# Altium PCB Boost Convertor V1 PCB.PcbDoc
Units mm, origin at the board's own origin, x right, y up, seen from the top; angles counter-clockwise.
Board outline 33.1 x 32.2 mm, 2 copper layers (Top Layer, Bottom Layer); 10 components, 7 nets, 27 pads, 1 vias.
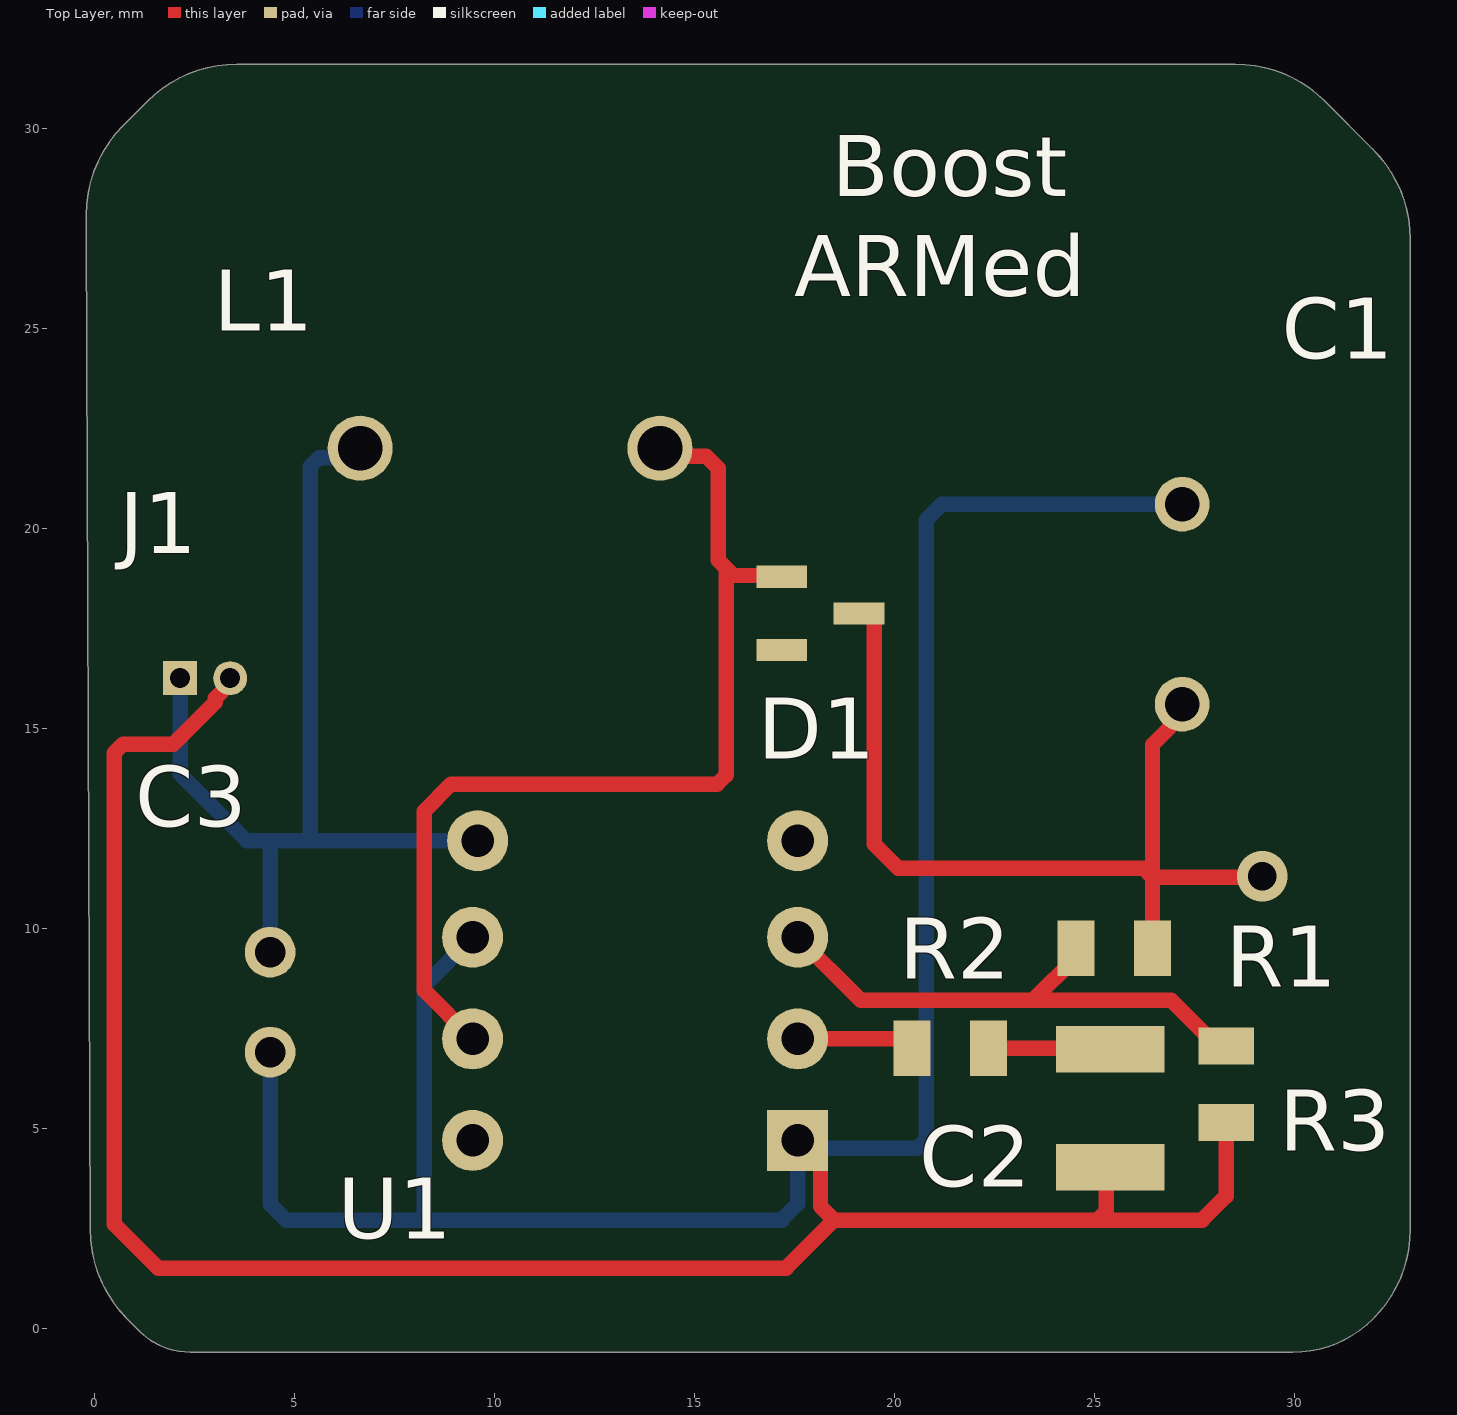
[diagram p0: Top Layer view]
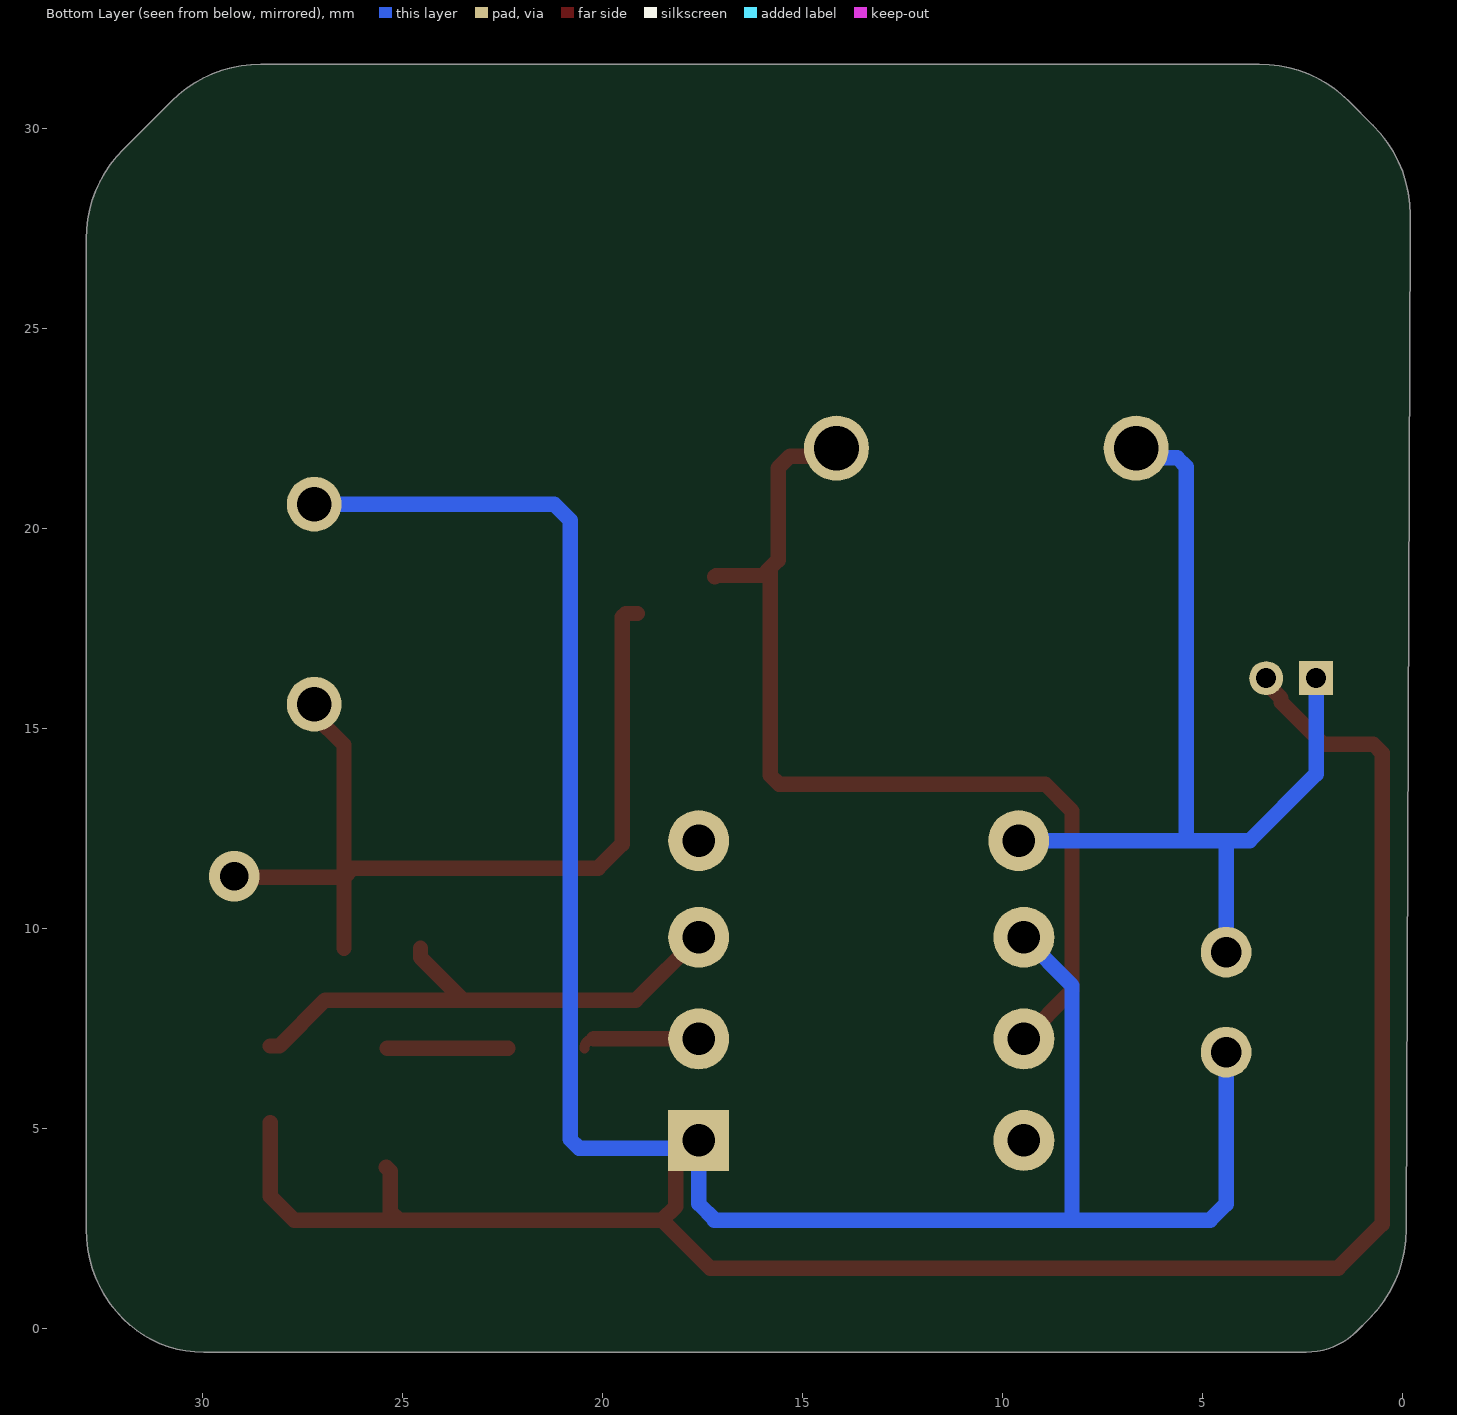
[diagram p1: Bottom Layer view, seen from below]
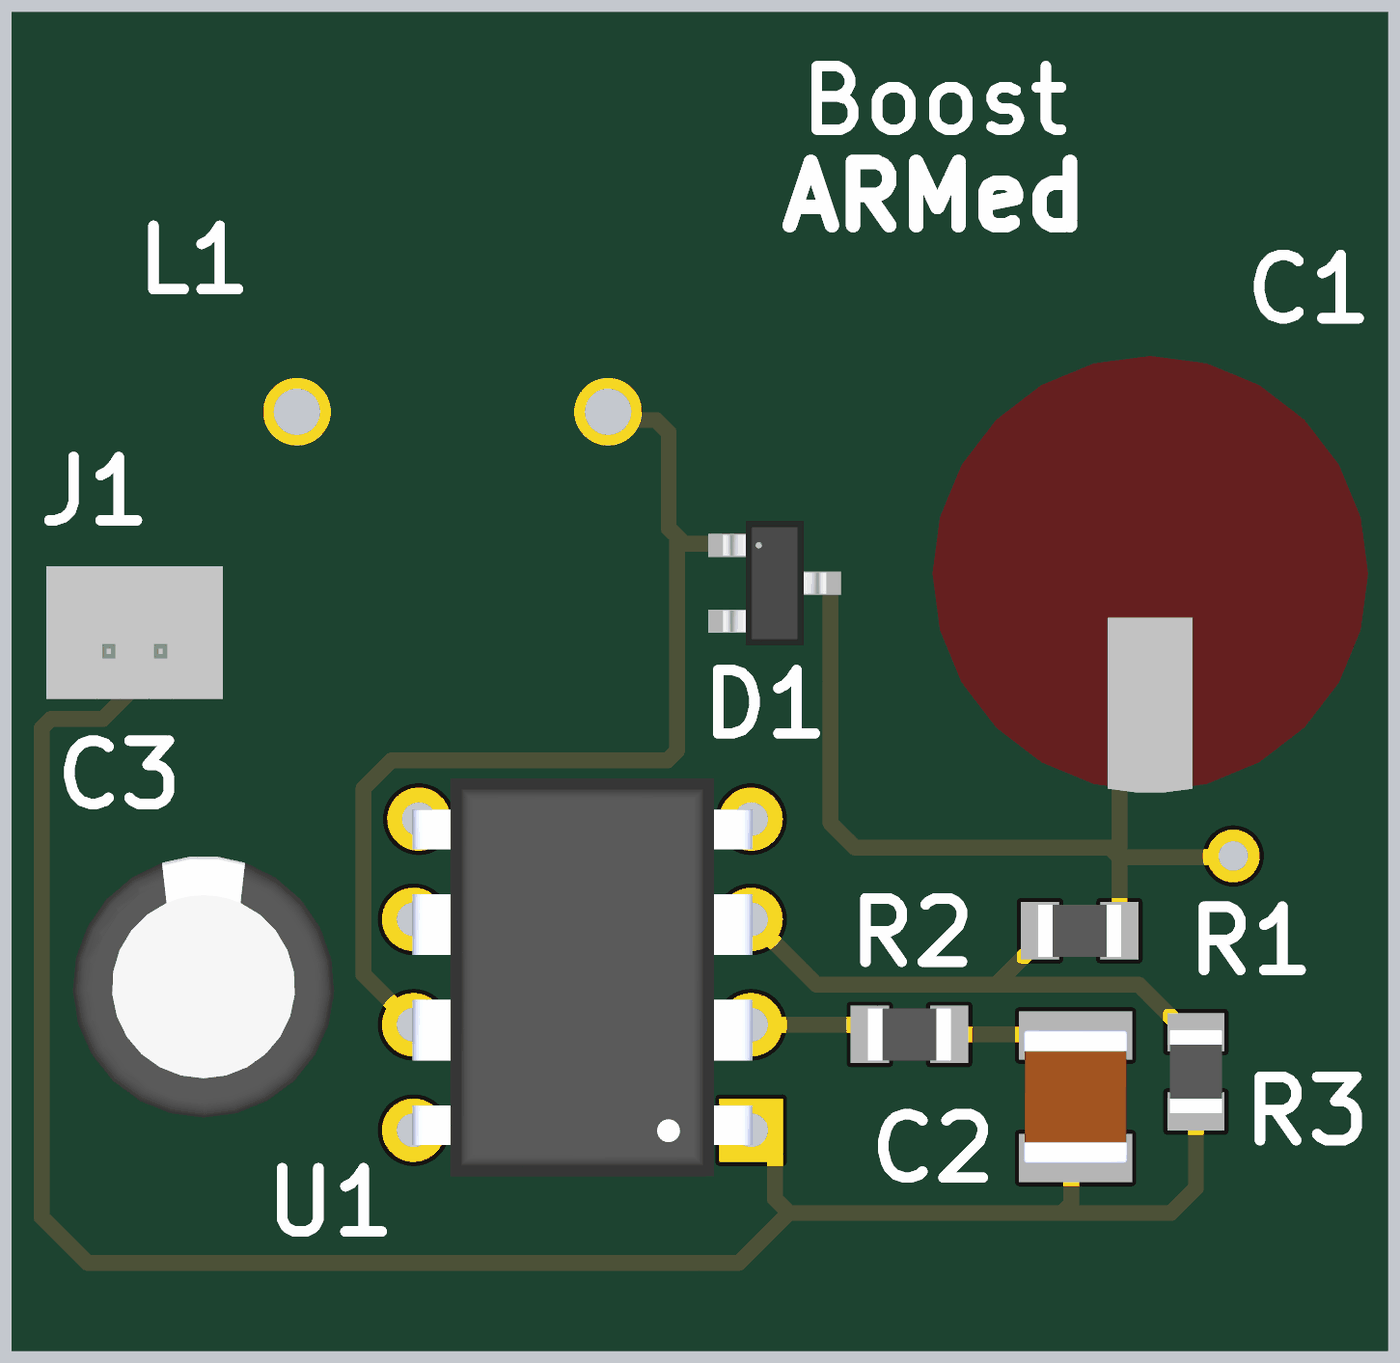
[diagram p2: 3D render of the assembled board from above, using the file's embedded part models]

## Layer stack, top to bottom
Top Solder: solder mask 0.0102, Solder Resist, Dk 3.5
Top Layer: signal copper 0.0356
Dielectric 1: dielectric 0.32, FR-4, Dk 4.8
Bottom Layer: signal copper 0.0356
Bottom Solder: solder mask 0.0102, Solder Resist, Dk 3.5

## Board outline
-0.1,2.47 ccw(c3.066,2.47) 0.827,0.231 1.134,-0.076 ccw(c2.4,1.19) 2.4,-0.6 29.966,-0.6 ccw(c29.966,2.238) 31.973,0.231 ccw(c29.734,2.47) 32.9,2.47 32.9,27.23 ccw(c29.734,27.23) 31.973,29.469 30.769,30.673 ccw(c28.53,28.434) 28.53,31.6 3.57,31.6 ccw(c3.57,28.434) 1.331,30.673 0.727,30.069 ccw(c2.966,27.83) -0.2,27.83 -0.2,27.5 -0.2,27.488

## Design rules (kind name [scope] priority, off if disabled: settings)
Clearance [All] p1: gap=0.254 ignorepadtopadclearanceinfootprint=FALSE
PolygonConnect [All] p1: connectstyle=Relief reliefconductorwidth=0.254 reliefentries=4 polygonreliefangle="90 Angle" airgapwidth=0.254
RoutingVias [All] p1: holewidth=0.711 width=1.27 viastyle="Through Hole" minholewidth=0.711 minwidth=1.27 maxholewidth=0.711 maxwidth=1.27
SolderMaskExpansion [All] p1: expansion=0.102 istentingtop=FALSE
SupplyNets "Schematic Supply Nets_2" [InNet('+5V')] p1: voltage=0.000
SupplyNets "Schematic Supply Nets_1" [InNet('GND')] p2: voltage=0.000
SupplyNets "Schematic Supply Nets" [InNet('+12V')] p3: voltage=0.000
Width [All] p1: maxlimit=0.381 minlimit=0.254 preferedwidth=0.254 minimp=50.000000 maximp=50.000000 favimp=50.000000
30 further rules are at their usual default settings.

## Components (designator, comment, footprint, x,y, rotation, side; value= is the part's Value field where it differs from the comment)
C1 "16ZLH1000MEFC10X16" 25PX1000MEFCT810X16 27.2,18.06 r270 top value=1000uF
C2 "CL10B105KA8NNNC" C1210C105K5RACTU 25.4,5.5 r270 top value=1uF
C3 "35ZLH100MEFC6.3X11" 35ZLH100MEFC6.3X11 4.4,8.17 r90 top value=100uF
D1 "BAT1000-7-F" BAT1000-7-F 17.9,18.25 r270 top
J1 "Comment" "Molex Connector" 2.775,16.25 r0 top
L1 "CTX50-1-52-R" CTX50-1-52-R 10.587,22.127 r0 top value=50uH
R1 "RC0805FR-0710K7L" RC0805FR-0710K7L 25.5,9.5 r0 top value=10.7K
R2 "#NAME?" RC0805FR-071KL 21.4,7 r0 top value=1kR
R3 "RC0805FR-071K24L" RC0805FR-071K24L 28.3,6.1 r270 top value=1.24K
U1 "LT1172CN8#PBF" LT1172CN8#PBF-ND 13.65,8.25 r180 top

## Footprints (in the part's own frame and the unit in brackets; to place one, negate y for a bottom-side part, rotate by r counter-clockwise, add the part's x,y. Pads: shape width x height; smd on the part's side, far side on the other; paste and mask are expansions set on the pad)
25PX1000MEFCT810X16 [mil] "Electrolytic Capacitor 1000uF"
  round 54 / inner round 60 / far side round 54 hole 34 paste-99999 mask+0: 1(-100,0) 2(96.85,0)
  body extent -208,-206 206,206, height 690
35ZLH100MEFC6.3X11 [mil] "Electrolytic Capacitor 100uF"
  round 50 / inner round 60 / far side round 50 hole 30 paste-99999 mask+0: 1(-50,0) 2(48.43,0)
  body extent -125,-124 123,124, height 492
BAT1000-7-F [mil] "Diode"
  rect 22x50 smd paste+0 mask+0: 1(-21.02,-28) 2(51.02,-28) 3(15,48)
  body extent -44,-39 74,59, height 43
C1210C105K5RACTU [mm] "Ceramic Capacitor 1uF"
  rect 1.16x2.72 smd: 1(-1.475,0) 2(1.475,0)
  body extent -1.6,-1.25 1.6,1.25, height 1.45
CTX50-1-52-R [mil] "Inductor 50uH"
  round 64 / inner round 60 / far side round 64 hole 44 paste-99999 mask+0: 1(-155,-5) 2(140,-5)
LT1172CN8#PBF-ND [mil] "ICU"
  rect 60x60 / inner round 60 / far side rect 60x60 hole 32: 1(-155,140)
  round 60 hole 32: 2(-155,40) 3(-155,-60) 4(-155,-155) 5(160,-155) 6(165,-60) 7(165,40) 8(165,140)
  body extent -156,-194 166,184, height 200
"Molex Connector" [mm]
  rect 0.85x0.85 / inner round 0.85 / far side rect 0.85x0.85 hole 0.5: 01(-0.625,0)
  round 0.85 hole 0.5: 02(0.625,0)
  body extent -2.16,-1.17 2.09,2.03, height 5.53
RC0805FR-071K24L [mm] "1.24Kohm Resistor"
  rect 0.92x1.38 smd: 1(-0.955,0) 2(0.955,0)
  body extent -1,-0.63 1,0.63, height 0.6
RC0805FR-071KL [mm] "1Kohm resistor"
  rect 0.92x1.38 smd: 1(-0.955,0) 2(0.955,0)
  body extent -1,-0.63 1,0.63, height 0.6
RC0805FR-0710K7L [mm] "Resistor 10.7 Kohm - 0805"
  rect 0.92x1.38 smd: 1(-0.955,0) 2(0.955,0)
  body extent -1,-0.63 1,0.63, height 0.6

## Part data
C1: "Aluminum Electrolytic Capacitor, Polarized, Aluminum (wet), 16V, 20% +Tol, 20% -Tol, 1000uF, Through Hole Mount", Capacitor Type=Aluminium, Leakage Current=160uA, Manufacturer=Rubycon, Manufacturer Series=ZLH, Max Operating Temperature=105°C, Min Operating Temperature=-40°C, Package Shape=Cylindrical, Package Style=RadialMeter, Rated DC Voltage (URdc)=16V, Ripple Current=1.056A, Supplier Part Number=1189-1147-ND, Tolerance  (fill in as +-)=20%, Category="Aluminum Electrolytic Capacitors", ComponentLink1Description=https://datasheet.ciiva.com:443/pdfs/VipMasterIC/IC/RUBY/RUBYS01453/RUBYS01453-1.pdf?src-supplier=IHS+Markit, ComponentLink1URL=https://datasheet.ciiva.com:443/pdfs/VipMasterIC/IC/RUBY/RUBYS01453/RUBYS01453-1.pdf?src-supplier=IHS+Markit, ComponentLink2Description=https://datasheet.ciiva.com/6300/e-zlh-6300460.pdf?src-supplier=Digikey, ComponentLink2URL=https://datasheet.ciiva.com/6300/e-zlh-6300460.pdf?src-supplier=Digikey, ComponentLink3Description=https://datasheet.ciiva.com/11692/e-zlh-11692166.pdf?src-supplier=Avnet, ComponentLink3URL=https://datasheet.ciiva.com/11692/e-zlh-11692166.pdf?src-supplier=Avnet, ComponentLink4Description=https://datasheet.ciiva.com/16313/e-zlh-16313390.pdf?src-supplier=Future+Electronics, ComponentLink4URL=https://datasheet.ciiva.com/16313/e-zlh-16313390.pdf?src-supplier=Future+Electronics, ComponentLink5Description=https://datasheet.ciiva.com/22732/1910927-22732477.pdf?src-supplier=Element14, ComponentLink5URL=https://datasheet.ciiva.com/22732/1910927-22732477.pdf?src-supplier=Element14, Diameter=10mm, Dielectric Material=Aluminium, Length=16mm, Manufacturer Part Number=16ZLH1000MEFC10X16, Mounting Technology="Through Hole", Packaging=Bulk, Pins=2, Polarity=Polarized, Pricing="1=0.61, 10=0.377, 50=0.2812, 100=0.2505, 500=0.19778, 1000=0.18113, 3000=0.16029, 5000=0.1525 (USD)", Reach SVHC Compliant=Yes, RoHS=Yes, RoHS Compliant=Yes, Stock=32532, Supplier=Digikey, Tan Delta=0.16, Terminal Pitch=5mm, Termination=Wire, Tolerance (fill in as +-)=20%
C2: "Ceramic Capacitor 1uF", Capacitor Type=Aluminium, Manufacturer=KEMET, Manufacturer Part Number=ESL105M100AC3AA, Supplier Part Number=399-15737-ND, ComponentLink1Description=https://datasheet.ciiva.com:443/pdfs/VipMasterIC/IC/KEME/KEME-S-A0008958449/KEME-S-A0008958449-1.pdf?src-supplier=IHS+Markit, ComponentLink1URL=https://datasheet.ciiva.com:443/pdfs/VipMasterIC/IC/KEME/KEME-S-A0008958449/KEME-S-A0008958449-1.pdf?src-supplier=IHS+Markit, ComponentLink2Description=https://api.kemet.com/component-edge/download/datasheet/ESL105M100AC3AA.pdf?src-supplier=Digikey, ComponentLink2URL=https://api.kemet.com/component-edge/download/datasheet/ESL105M100AC3AA.pdf?src-supplier=Digikey, ComponentLink3Description=https://datasheet.octopart.com/ESL105M100AC3AA-KEMET-datasheet-176335207.pdf?src-supplier=Newark, ComponentLink3URL=https://datasheet.octopart.com/ESL105M100AC3AA-KEMET-datasheet-176335207.pdf?src-supplier=Newark, Pins=2, Pricing="1=0.15, 10=0.095, 50=0.0708, 100=0.0633, 500=0.04972, 1000=0.04522, 2500=0.04024, 5000=0.03706 (USD)", Reach SVHC Compliant=Yes, RoHS=Yes, RoHS Compliant=Yes, Stock=14632, Supplier=Digikey, Supplier 1=Avnet, Supplier Part Number 1=CL10B105KA8NNNC
C3: library part a00bbbee19879c290e62620ae7e47b1, "CAP ALUM 100UF 20% 35V RADIAL", Capacitance=100uF, Case/Package=Radial, Dielectric Material=Aluminium, Leakage Current=3uA, Max Operating Temperature=105°C, Min Operating Temperature=-40°C, Package Quantity=2000, Ripple Current=540mA, Tolerance=20%, Voltage=35V, Construction=RADIAL, Diameter=6.3mm, Height=11mm, Height - Seated (Max)=0.492inch, Impedance=94mR, Lead Diameter=0.5mm, Lead Pitch=2.5mm, Life (Hours)=6000Hour, Mount="Through Hole", Number of Pins=2, Packaging=Bulk, Radiation Hardening=No, REACH SVHC="No SVHC", Ripple Current (AC)=540mA, RoHS Compliant=Yes, Series=ZLH, Termination=Radial, Voltage Rating=35V, Voltage Rating (DC)=35V
D1: "Diode 40 V 1A Surface Mount SOT-23-3", Forward Voltage=270mV, Manufacturer=Diodes, Max Operating Temperature=125°C, Max Output current=1A, Max Power Dissipation=500mW, Min Operating Temperature=-40°C, Non-rep Pk Forward Current-Max=5.5A, Package Body Material=Plastic, Package Shape=Rectangular, Package Style="SMALL OUTLINEMeter", Peak Reflow Temperature (Cel)=260°C, Rep Pk Reverse Voltage-Max=40V, Supplier Part Number=BAT1000-7FDICT-ND, Time @ Peak Reflow Temperature-Max (s)=40s, Additional Feature="HIGH RELIABILITY", Category="Rectifier Diodes", ComponentLink1Description=https://datasheet.ciiva.com:443/pdfs/VipMasterIC/IC/DIOD/DIODS20202/DIODS20202-1.pdf?src-supplier=IHS+Markit, ComponentLink1URL=https://datasheet.ciiva.com:443/pdfs/VipMasterIC/IC/DIOD/DIODS20202/DIODS20202-1.pdf?src-supplier=IHS+Markit, ComponentLink2Description=https://datasheet.ciiva.com/4715/ds30245-88157-4715721.pdf?src-supplier=Mouser, ComponentLink2URL=https://datasheet.ciiva.com/4715/ds30245-88157-4715721.pdf?src-supplier=Mouser, ComponentLink3Description=https://datasheet.ciiva.com/26949/getdatasheetpartid-128111-26949412.pdf?src-supplier=Verical, ComponentLink3URL=https://datasheet.ciiva.com/26949/getdatasheetpartid-128111-26949412.pdf?src-supplier=Verical, ComponentLink4Description=https://datasheet.ciiva.com/48678/ds30245-48678245.pdf?src-supplier=Avnet, ComponentLink4URL=https://datasheet.ciiva.com/48678/ds30245-48678245.pdf?src-supplier=Avnet, ComponentLink5Description=https://datasheet.ciiva.com/8301/ds30245-8301339.pdf?src-supplier=Avnet, ComponentLink5URL=https://datasheet.ciiva.com/8301/ds30245-8301339.pdf?src-supplier=Avnet, ComponentLink6Description=https://datasheet.ciiva.com/16418/ds30245-16418363.pdf?src-supplier=Future+Electronics, ComponentLink6URL=https://datasheet.ciiva.com/16418/ds30245-16418363.pdf?src-supplier=Future+Electronics, Diode Element Material=SILICON, Diode Type=RECTIFIER, JESD-30 Code=R-PDSO-G3, JESD-609 Code=e3, Manufacturer Part Number=BAT1000-7-F, Moisture Sensitivity Level=1, Number of Elements=1, Pins=3, Pricing="1=0.63, 10=0.416, 100=0.3252, 500=0.25124, 1000=0.2177 (USD)", Qualification Status="Not Qualified", Reach SVHC Compliant=Yes, RoHS=Yes, RoHS Compliant=Yes, Stock=10173, Supplier=Digikey, Surface Mount=Yes, Technology=SCHOTTKY, Terminal Finish=Tin, Terminal Form="Gull Wing", Terminal Position=DUAL
L1: "General Purpose Inductor, 50uH, 1 Element, Iron-Core", DC Resistance (DCR)=71.5mR, Inductance-Nom (L)=50uH, Inductor Application="POWER INDUCTOR", Inductor Type="GENERAL PURPOSE INDUCTOR", Manufacturer="Eaton Cooper", Max Current Rating=2.6A, Max Operating Temperature=75°C, Min Operating Temperature=-40°C, Package Diameter=16.2mm, Package Length=9mm, Package Style=ToroidalMeter, Supplier Part Number=513-1108-ND, Category="Fixed Inductors", Channels=1, ComponentLink1Description=https://datasheet.ciiva.com:443/pdfs/VipMasterIC/IC/ETON/ETON-S-A0008259577/ETON-S-A0008259577-1.pdf?src-supplier=IHS+Markit, ComponentLink1URL=https://datasheet.ciiva.com:443/pdfs/VipMasterIC/IC/ETON/ETON-S-A0008259577/ETON-S-A0008259577-1.pdf?src-supplier=IHS+Markit, ComponentLink2Description=https://datasheet.ciiva.com/8005/705007-8005134.pdf?src-supplier=Element14, ComponentLink2URL=https://datasheet.ciiva.com/8005/705007-8005134.pdf?src-supplier=Element14, ComponentLink3Description=https://datasheet.ciiva.com/16430/bus-elx-ds-pm4304-lpci-series-16430805.pdf?src-supplier=Future+Electronics, ComponentLink3URL=https://datasheet.ciiva.com/16430/bus-elx-ds-pm4304-lpci-series-16430805.pdf?src-supplier=Future+Electronics, ComponentLink4Description=https://datasheet.ciiva.com/30168/4935b080188143dbb73de2176f2c5e73-30168168.pdf?src-supplier=Onlinecomponents.com, ComponentLink4URL=https://datasheet.ciiva.com/30168/4935b080188143dbb73de2176f2c5e73-30168168.pdf?src-supplier=Onlinecomponents.com, Construction="Vertical Mount", Core Material=Ferrite, Lead Diameter=0.58mm, Lead Length=10mm, Lead Pitch=7.5mm, Manufacturer Part Number=CTX50-1-52-R, Packaging=Bulk, Pins=2, Pricing="1=2.67, 10=2.196, 25=2.0312, 50=1.915, 100=1.8057, 300=1.6451, 600=1.55137, 1200=1.46311, 2700=1.36639 (USD)", Reach SVHC Compliant=Yes, RoHS=Yes, RoHS Compliant=Yes, Shape/Size Description="CYLINDRICAL PACKAGE", Shielding=Unshielded, Stock=1049, Supplier=Digikey, Surface Mount=No, Terminal Placement=Radial, Termination=Wire
R1: "Fixed Resistor, Metal Film, 0.25W, 10700ohm, 250V, 1% +/-Tol, -100,100ppm/Cel", Manufacturer=Yageo, Manufacturer Part Number=MFR-25FBF52-10K7, Supplier Part Number=10.7KXBK-ND, Supplier Part Number 1=311-10.7KCRCT-ND, Category="Through-Hole Resistors", ComponentLink1Description=https://datasheet.ciiva.com:443/pdfs/VipMasterIC/IC/YAGO/YAGO-S-A0009358480/YAGO-S-A0009358480-1.pdf?src-supplier=IHS+Markit, ComponentLink1URL=https://datasheet.ciiva.com:443/pdfs/VipMasterIC/IC/YAGO/YAGO-S-A0009358480/YAGO-S-A0009358480-1.pdf?src-supplier=IHS+Markit, ComponentLink2Description=https://datasheet.ciiva.com/25645/yageolr-mfr-2013-25645816.pdf?src-supplier=Digikey, ComponentLink2URL=https://datasheet.ciiva.com/25645/yageolr-mfr-2013-25645816.pdf?src-supplier=Digikey, Pricing="1=0.1, 10=0.039, 25=0.0328, 50=0.0286, 100=0.0251, 250=0.02128, 500=0.0189, 1000=0.01685, 5000=0.01321 (USD)", RoHS=Yes, Stock=6622, Supplier=Digikey, Supplier 1=Digikey
R2: library part RC0805FR-071KL, "Fixed Resistor, Carbon Film, 0.25W, 1000ohm, 350V, 5% +/-Tol, -400,0ppm/Cel, Through Hole Mount", Manufacturer="Stackpole Electronics", Manufacturer Part Number=CF14JT1K00, Max Operating Temperature=155°C, Min Operating Temperature=-55°C, Package Length=6mm, Package Shape=Tubular, Package Style=AXIAL, Power=250mW, Rated Temperature=70°C, Resistor Type="FIXED RESISTOR", Supplier Part Number=CF14JT1K00CT-ND, Supplier Part Number 1=311-1.00KCRCT-ND, Temperature Coefficient (ppm/Cel)=400, Tolerance=5%, Working Voltage=350V, Category="Through-Hole Resistors", ComponentLink1Description=https://datasheet.ciiva.com:443/pdfs/VipMasterIC/IC/SEIE/SEIE-S-A0009883960/SEIE-S-A0009883960-1.pdf?src-supplier=IHS+Markit, ComponentLink1URL=https://datasheet.ciiva.com:443/pdfs/VipMasterIC/IC/SEIE/SEIE-S-A0009883960/SEIE-S-A0009883960-1.pdf?src-supplier=IHS+Markit, ComponentLink2Description=https://www.seielect.com/catalog/SEI-Packaging.pdf?src-supplier=Digikey, ComponentLink2URL=https://www.seielect.com/catalog/SEI-Packaging.pdf?src-supplier=Digikey, ComponentLink3Description=https://www.seielect.com/Catalog/SEI-CF_CFM.pdf?src-supplier=Digikey, ComponentLink3URL=https://www.seielect.com/Catalog/SEI-CF_CFM.pdf?src-supplier=Digikey, ComponentLink4Description=https://www.verical.com/server-webapp/html/getDatasheet?partID=360403&src-supplier=Verical, ComponentLink4URL=https://www.verical.com/server-webapp/html/getDatasheet?partID=360403&src-supplier=Verical, ComponentLink5Description=https://www.seielect.com/catalog/SEI-CF_CFM.pdf?src-supplier=Avnet, ComponentLink5URL=https://www.seielect.com/catalog/SEI-CF_CFM.pdf?src-supplier=Avnet, ComponentLink6Description=http://components.arrow.com/part/dataview/27620077S9848643N1174?src-supplier=Arrow+Electronics, ComponentLink6URL=http://components.arrow.com/part/dataview/27620077S9848643N1174?src-supplier=Arrow+Electronics, ComponentLink7Description=https://datasheet.octopart.com/CF14JT1K00-Stackpole-Electronics-datasheet-8360004.pdf?src-supplier=Future+Electronics, ComponentLink7URL=https://datasheet.octopart.com/CF14JT1K00-Stackpole-Electronics-datasheet-8360004.pdf?src-supplier=Future+Electronics, ComponentLink8Description=http://www.seielect.com/Catalog/SEI-CF_CFM.pdf?src-supplier=Future+Electronics, ComponentLink8URL=http://www.seielect.com/Catalog/SEI-CF_CFM.pdf?src-supplier=Future+Electronics, ComponentLink9Description=https://datasheet.octopart.com/CF14JT1K00-Stackpole-Electronics-datasheet-32780772.pdf?src-supplier=Electro+Sonic, ComponentLink9URL=https://datasheet.octopart.com/CF14JT1K00-Stackpole-Electronics-datasheet-32780772.pdf?src-supplier=Electro+Sonic, ComponentLink10Description=https://datasheet.octopart.com/CF14JT1K00-Stackpole-Electronics-datasheet-32780772.pdf?src-supplier=Master+Electronics, ComponentLink10URL=https://datasheet.octopart.com/CF14JT1K00-Stackpole-Electronics-datasheet-32780772.pdf?src-supplier=Master+Electronics, Construction=Tubular, JESD-609 Code=e3, Lead Diameter=0.55mm, Lead Length=28mm, Mounting Technology="Through Hole", Packaging="Tape and Reel", Pins=2, Pricing="1=0.1, 10=0.026, 25=0.022, 50=0.0192, 100=0.0169, 250=0.01424, 500=0.0126, 1000=0.0112 (USD)", Reach SVHC Compliant=Yes, RoHS=Yes, RoHS Compliant=Yes, Stock=444805, Supplier=Digikey, Supplier 1=Digikey, Technology="CARBON FILM", Terminal Finish=Tin, Termination=Wire
R3: "Fixed Resistor, Metal Film, 0.25W, 1240ohm, 250V, 1% +/-Tol, -100,100ppm/Cel", Manufacturer=Yageo, Manufacturer Part Number=MFR-25FBF52-1K24, Supplier Part Number=1.24KXBK-ND, Supplier Part Number 1=311-1.24KCRCT-ND, Category="Through-Hole Resistors", ComponentLink1Description=https://datasheet.ciiva.com:443/pdfs/VipMasterIC/IC/YAGO/YAGO-S-A0009358480/YAGO-S-A0009358480-1.pdf?src-supplier=IHS+Markit, ComponentLink1URL=https://datasheet.ciiva.com:443/pdfs/VipMasterIC/IC/YAGO/YAGO-S-A0009358480/YAGO-S-A0009358480-1.pdf?src-supplier=IHS+Markit, ComponentLink2Description=https://datasheet.ciiva.com/25646/yageolr-mfr-2013-25646123.pdf?src-supplier=Digikey, ComponentLink2URL=https://datasheet.ciiva.com/25646/yageolr-mfr-2013-25646123.pdf?src-supplier=Digikey, Pricing="1=0.1, 10=0.039, 25=0.0328, 50=0.0286, 100=0.0251, 250=0.02128, 500=0.0189, 1000=0.01685, 5000=0.01321 (USD)", RoHS=Yes, Stock=9531, Supplier=Digikey, Supplier 1=Digikey
U1: library part LT-LT1172-X8-8, "100 kHz, 1.25 A, High Efficiency Switching Regulator, 8-pin DIP (N8-8), 0 to 100 degC, Pb-Free", Frequency Sync Range="120kHz - 160kHz", Manufacturer="Linear Technology", ComponentLink1Description="Manufacturer URL", ComponentLink1URL=http://www.linear.com/, ComponentLink2Description=Datasheet, ComponentLink2URL=http://cds.linear.com/docs/en/datasheet/117012fg.pdf, ComponentLink3Description="Package Specification", ComponentLink3URL=http://www.linear.com/docs/en/packaging/05081510_I_N8.pdf, DatasheetVersion="Rev. G", Mounting Technology="Through Hole", Number of Outputs=1, PackageDescription="8-Pin PDIP, Body 10.16 x 6.48 mm, Pitch 2.54 mm", PackageReference=N8-8, PackageVersion="Rev. I, 07/2011", PartNumber=LT1172CN8#PBF, RoHS=TRUE

## Via types
v1: diameter 1.27, hole 0.711, Top Layer to Bottom Layer, 1 vias

## Nets (pads, with @x,y where several pads share a name; then routed paths per layer and width w, separated by ;. In a path a pad name is that pad's centre, name@x,y a point inside that pad or via, vN(x,y) a via of type N, cw(c..) or ccw(c..) an arc to the next point about the centre after c; other vN are vias at no path point)
+5V: C3.2 J1.01 L1.1 U1.5 | length 24.1
  Bottom Layer w0.381: J1.01 2.15,13.85 3.813,12.187 4.3,12.187 ; C3.2 4.4,12.087 4.3,12.187 ; L1.1 6.412,21.762 5.623,21.762 5.4,21.539 5.4,12.187 ; U1.5 5.4,12.187 ; 4.3,12.187 5.4,12.187
+12V: C1.2 D1.3 R1.2 | length 22.6
  Top Layer w0.381: D1.3 19.411,17.869 19.5,17.78 19.5,12.1 20.1,11.5 26.227,11.5 26.455,11.272 ; R1.2 26.455,11.272 ; C1.2 27.2,15.332 26.455,14.587 26.455,11.272 ; v1(29.2,11.3) 29.172,11.272 26.455,11.272
FB: R1.1 R3.1 U1.3 | length 13.6
  Top Layer w0.381: U1.3 19.161,8.2 23.475,8.2 ; R1.1 24.545,9.27 23.475,8.2 ; R3.1 28.07,7.055 26.925,8.2 23.475,8.2
GND: C1.1 C2.2 C3.1 J1.02 R3.2 U1.1 U1.6 | length 102.2
  Top Layer w0.381: J1.02 3.4,16.123 3.029,15.752 3.029,15.65 1.979,14.6 0.723,14.6 0.5,14.377 0.5,2.6 1.6,1.5 17.3,1.5 18.5,2.7 ; U1.1 18.159,4.123 18.159,3.042 18.5,2.7 ; C2.2 25.3,3.925 25.3,2.923 25.077,2.7 ; R3.2 28.3,3.3 27.7,2.7 25.077,2.7 ; 18.5,2.7 25.077,2.7
  Bottom Layer w0.381: C3.1 4.4,3.1 4.8,2.7 ; 4.823,2.7 8.3,2.7 ; U1.6 8.253,8.568 8.253,2.748 8.3,2.7 ; 17.2,2.7 17.177,2.7 ; C1.1 21.2,20.6 20.8,20.2 20.8,4.723 20.577,4.5 17.781,4.5 U1.1 17.587,3.11 17.177,2.7 ; 8.3,2.7 17.177,2.7
NetC2_1: C2.1 R2.2 | length 3.1
  Top Layer w0.254: C2.1@25.375,7 C2.1
  Top Layer w0.381: R2.2 C2.1@25.375,7
Vc: R2.1 U1.2 | length 3
  Top Layer w0.254: R2.1@20.211,7.234 cw(c20.211,7) R2.1
  Top Layer w0.381: U1.2 R2.1@20.211,7.234
VSW: D1.1 L1.2 U1.7 | length 25
  Top Layer w0.381: U1.7 8.253,8.441 8.253,12.929 8.923,13.6 15.577,13.6 15.8,13.823 15.8,19 ; L1.2 14.343,21.8 15.3,21.8 15.6,21.5 15.6,19.2 15.8,19 ; D1.1 17.155,18.818 15.982,18.818 15.8,19
pads on no net: D1.2 U1.4 U1.8

## Silkscreen, mask and mechanical layers (free items; w line width, h text height)
Top Overlay:
  text "Boost" at 18.445,28.3 h1.52
  text "ARMed" at 17.5,25.8 h1.52